# Altium PCB 题目二PCB.PcbDoc
Units mm, origin at the board's own origin, x right, y up, seen from the top; angles counter-clockwise.
Board outline 79 x 72 mm, 2 copper layers (Top Layer, Bottom Layer); 26 components, 43 nets, 197 pads, 4 vias.
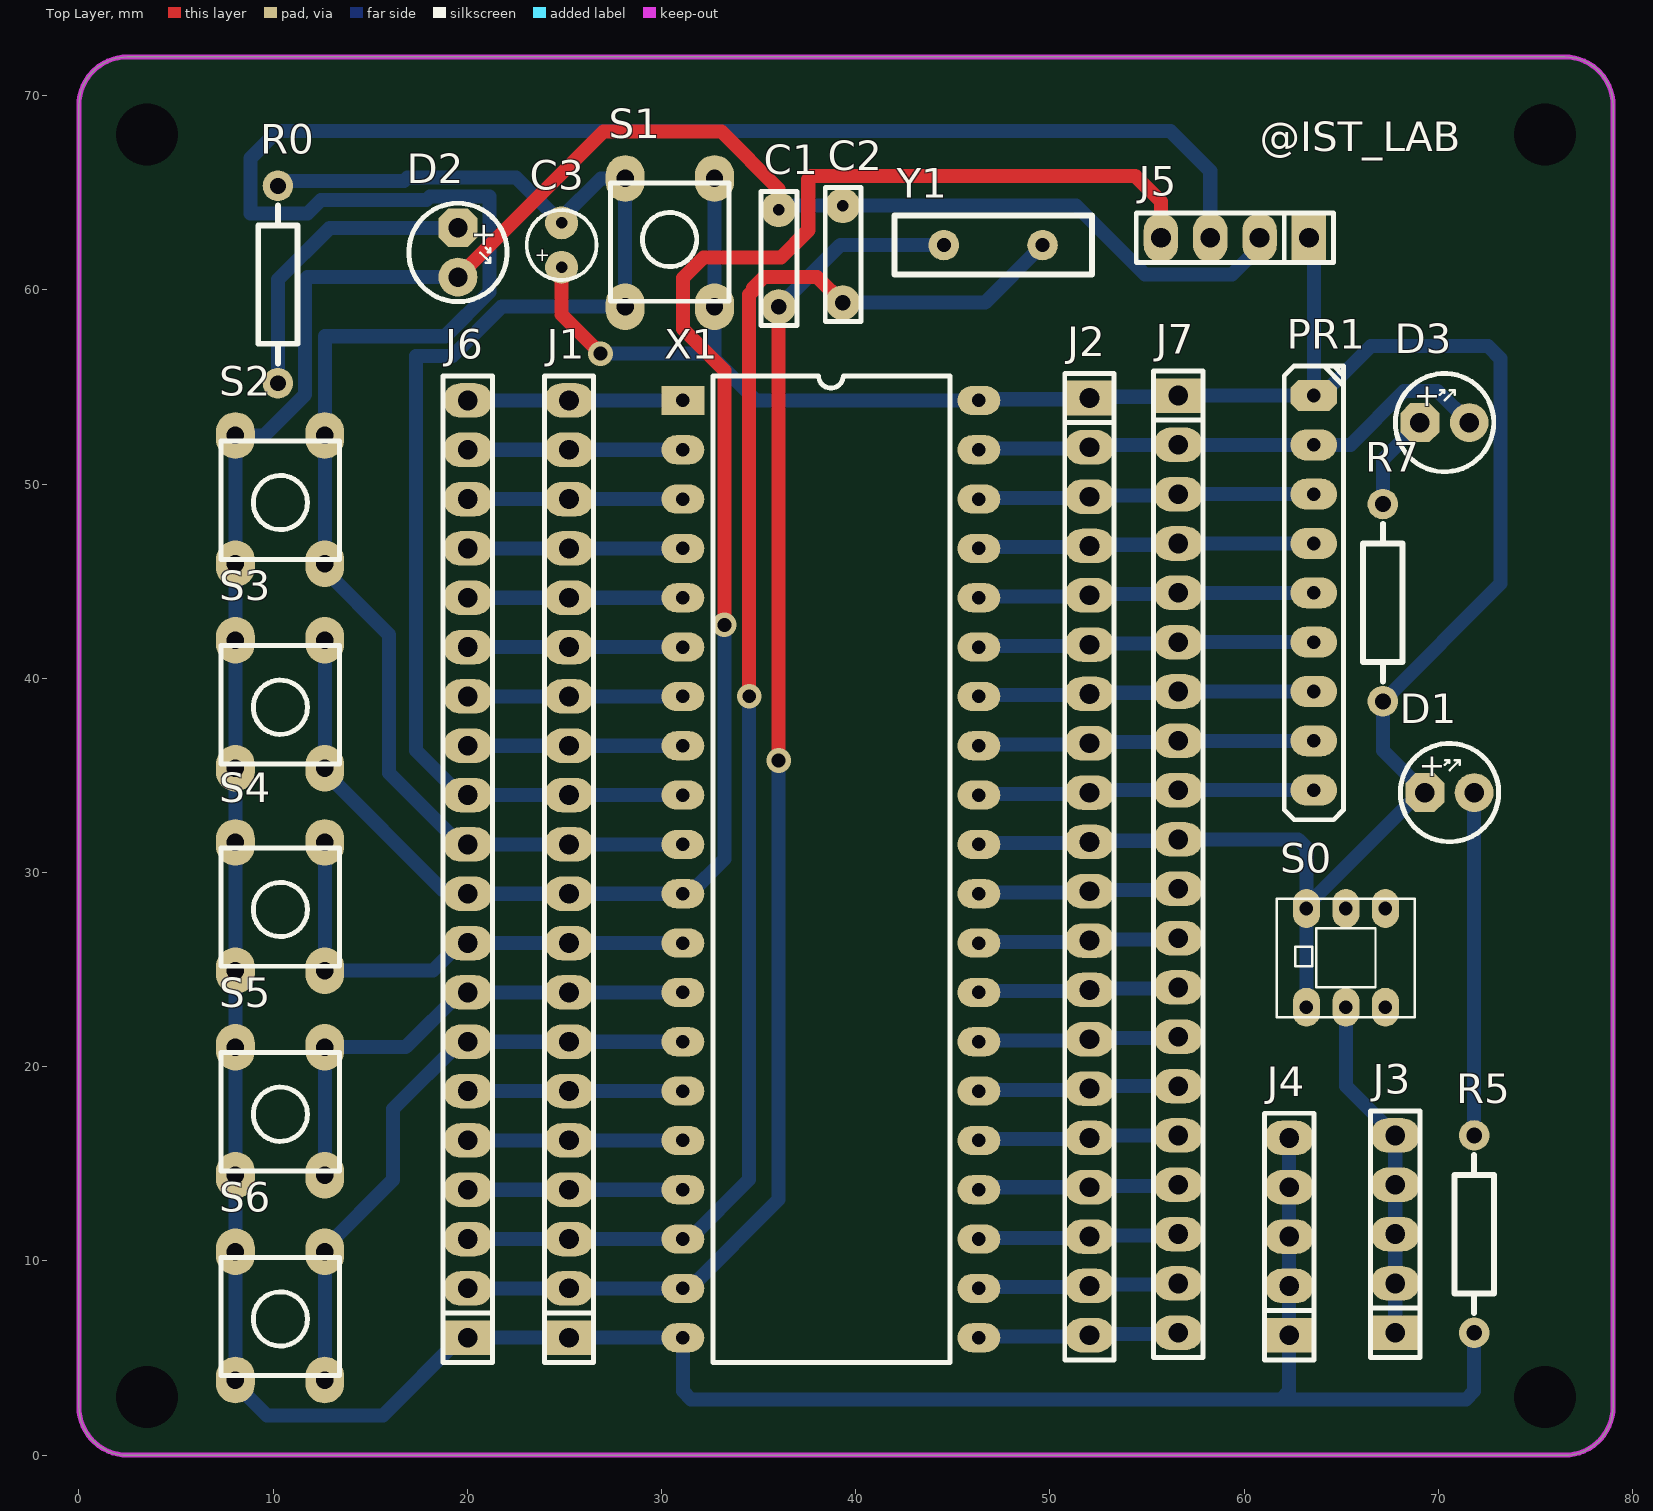
[diagram p0: Top Layer view]
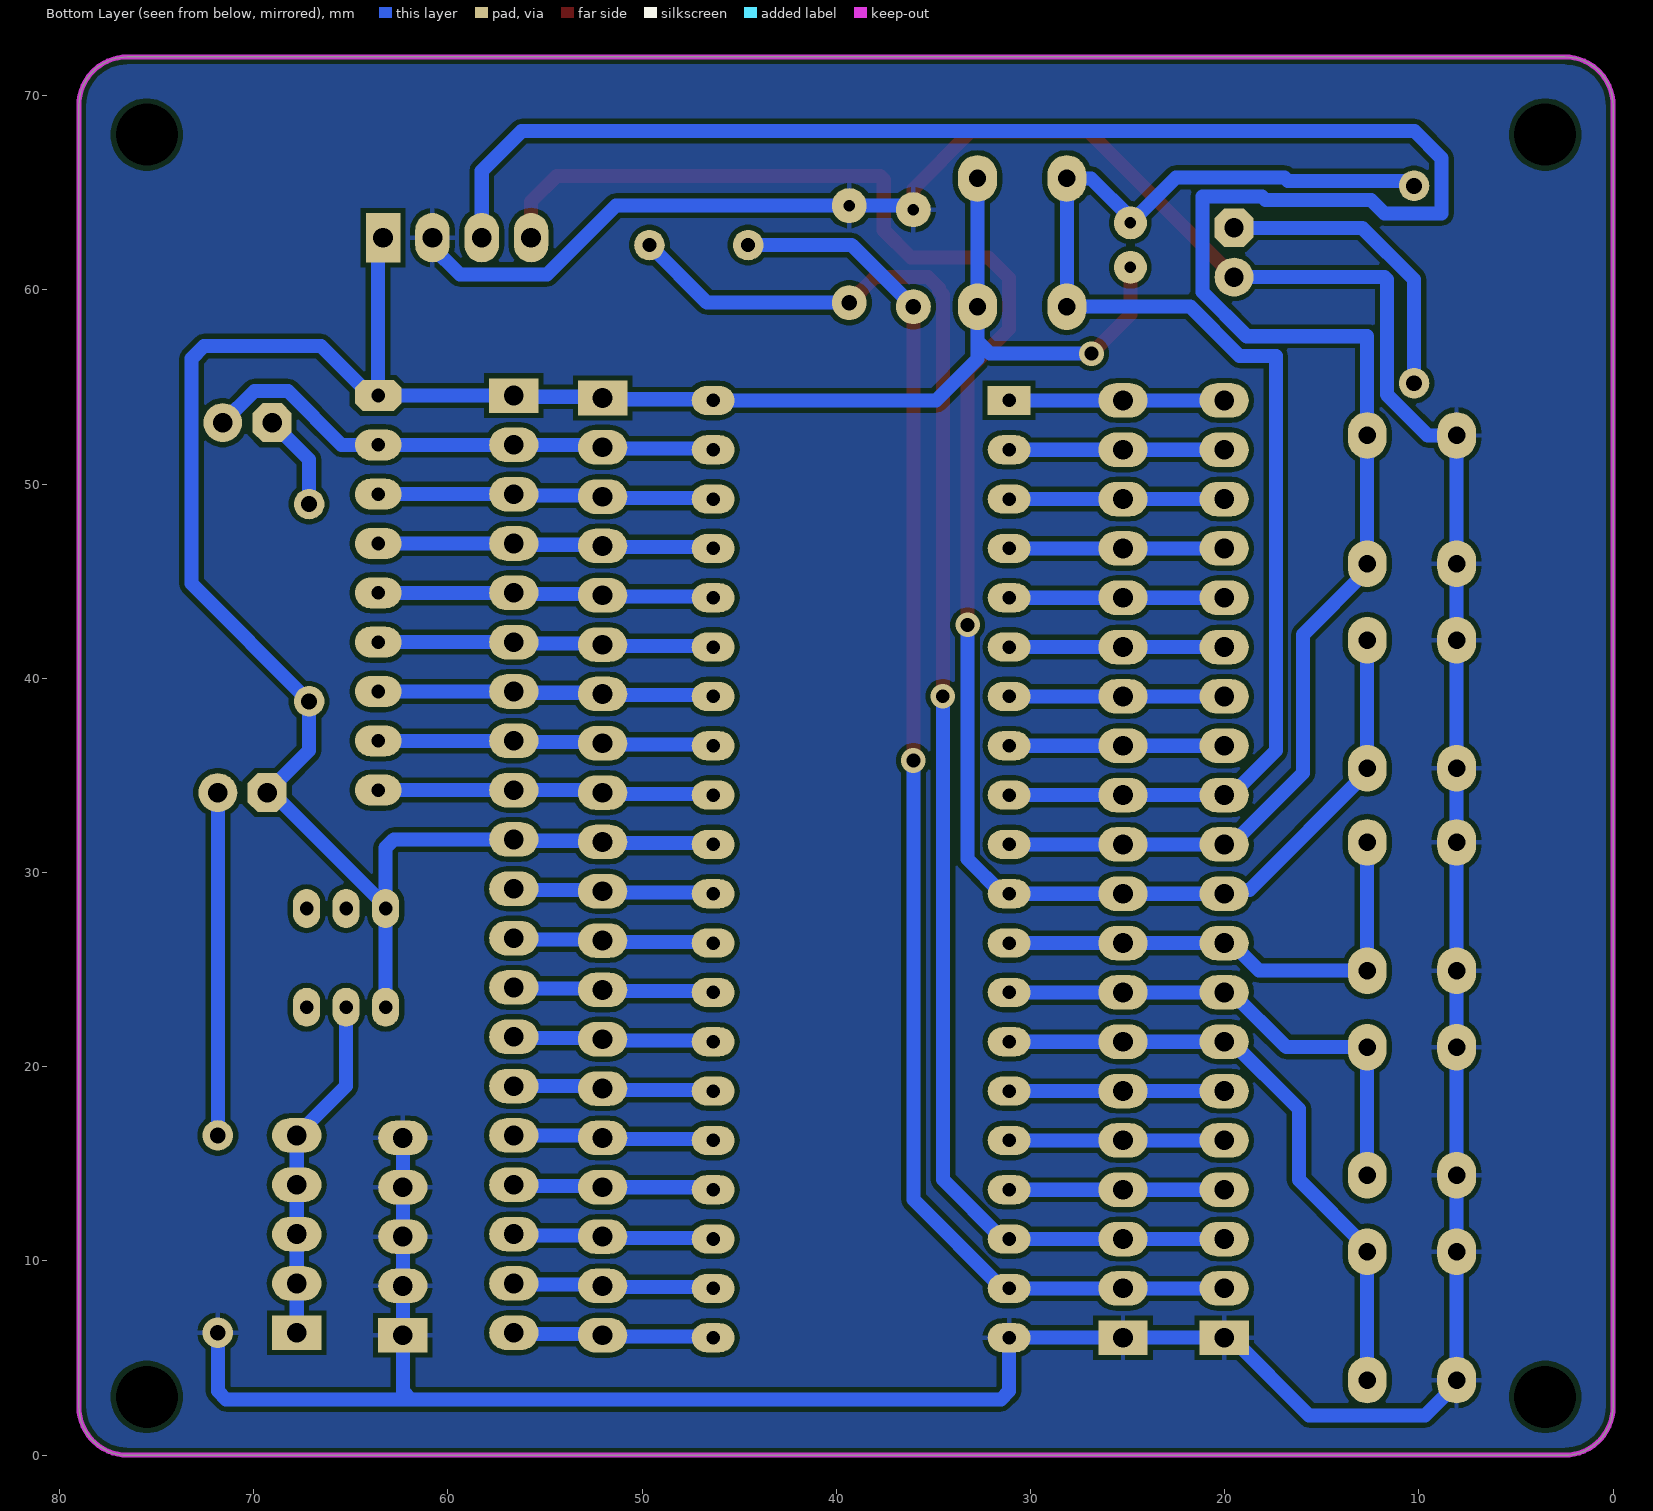
[diagram p1: Bottom Layer view, seen from below]

## Layer stack, top to bottom
Top Solder: solder mask 0.0102, Solder Resist, Dk 3.5
Top Layer: signal copper 0.0356
Dielectric 1: dielectric 0.32, FR-4, Dk 4.8
Bottom Layer: signal copper 0.0356
Bottom Solder: solder mask 0.0102, Solder Resist, Dk 3.5

## Board outline
0,2.5 ccw(c2.5,2.5) 2.5,0 76.5,0 ccw(c76.5,2.5) 79,2.5 79,69.5 ccw(c76.5,69.5) 76.5,72 2.5,72 ccw(c2.5,69.5) 0,69.5

## Design rules (kind name [scope] priority, off if disabled: settings)
Clearance [All] p1: gap=0.254 ignorepadtopadclearanceinfootprint=FALSE except(0: Arc-Hole Track-Hole SMDPad-Hole THPad-Hole Via-Hole Fill-Hole Poly-Hole Region-Hole Text-Hole)
PolygonConnect [All] p1: connectstyle=Relief reliefconductorwidth=0.254 reliefentries=4 polygonreliefangle="90 Angle" airgapwidth=0.254
RoutingVias [All] p1: holewidth=0.711 width=1.27 viastyle="Through Hole" minholewidth=0.711 minwidth=1.27 maxholewidth=0.711 maxwidth=1.27
SolderMaskExpansion [All] p1: expansion=0.102 istentingtop=FALSE
Width [All] p1: maxlimit=0.8 minlimit=0.6 preferedwidth=0.725 minimp=50.000000 maximp=50.000000 favimp=50.000000
30 further rules are at their usual default settings.

## Components (designator, comment, footprint, x,y, rotation, side; value= is the part's Value field where it differs from the comment)
C1 "22pf" CAP2 36.031,59.135 r90 top
C2 "22pf" CAP2 39.333,59.342 r90 top
C3 "10uf" CAO1 24.855,62.31 r90 top
D1 "LED" LED2_B 70.575,34.116 r0 top
D2 "LED" LED2_B 19.521,61.929 r270 top
D3 "LED" LED2_B 70.321,53.166 r0 top
J1 "CON20" sip-20 25.236,6.049 r90 top
J2 "CON20" sip-20 52.033,54.436 r270 top
J3 "CON5" sip-5 67.781,6.303 r90 top
J4 "CON5" sip-5 62.32,6.176 r90 top
J5 "CON4" sip-4 63.336,62.691 r180 top
J6 "CON20" sip-20 20.029,6.049 r90 top
J7 "CON20" sip-20 56.605,54.563 r270 top
PR1 "10K" RP1 63.59,54.563 r270 top
R0 "10K" AXIAL0.4 10.25,55.198 r90 top
R5 "1K" AXIAL0.4 71.845,16.463 r270 top
R7 "1K" AXIAL0.4 67.146,48.975 r270 top
S0 "SW-DPDT" SWH7*7 67.273,23.067 r180 top
S1 "SW-PB" SW6*6 28.129,59.139 r90 top
S2 "SW-PB" SW6*6 12.663,52.506 r270 top
S3 "SW-PB" SW6*6 12.663,41.965 r270 top
S4 "SW-PB" SW6*6 12.663,31.551 r270 top
S5 "SW-PB" SW6*6 12.663,21.01 r270 top
S6 "SW-PB" SW6*6 12.663,10.469 r270 top
X1 "STC89C52RC-DIP40" DIP-40 31.103,54.309 r0 top
Y1 "XTAL" XTAL1 49.62,62.31 r270 top

## Footprints (in the part's own frame and the unit in brackets; to place one, negate y for a bottom-side part, rotate by r counter-clockwise, add the part's x,y. Pads: shape width x height; smd on the part's side, far side on the other; paste and mask are expansions set on the pad)
AXIAL0.4 [mil]
  round 62 hole 32: 1(0,0) 2(400,0)
  silkscreen extent 40,-40 360,40
CAO1 [mm]
  round 1.7 hole 0.6: 1(-1.143,0) 2(1.143,0)
  silkscreen extent -1.8,-1.8 1.8,1.8
CAP2 [mm]
  round 1.8 hole 0.8: 1(0,0)
  round 1.8 hole 0.6: 2(5,0)
  silkscreen extent -0.98,-0.95 5.93,0.9
DIP-40 [mm]
  rect 2.2x1.5 hole 0.7: 1(0,0)
  oval 2.2x1.5 hole 0.7: 2(0,-2.54) 3(0,-5.08) 4(0,-7.62) 5(0,-10.16) 6(0,-12.7) 7(0,-15.24) 8(0,-17.78) 9(0,-20.32) 10(0,-22.86) 11(0,-25.4) 12(0,-27.94) 13(0,-30.48) 14(0,-33.02) 15(0,-35.56) 16(0,-38.1) 17(0,-40.64) 18(0,-43.18) 19(0,-45.72) 20(0,-48.26) 21(15.24,-48.26) 22(15.24,-45.72) 23(15.24,-43.18) 24(15.24,-40.64) 25(15.24,-38.1) 26(15.24,-35.56) 27(15.24,-33.02) 28(15.24,-30.48) 29(15.24,-27.94) 30(15.24,-25.4) 31(15.24,-22.86) 32(15.24,-20.32) 33(15.24,-17.78) 34(15.24,-15.24) 35(15.24,-12.7) 36(15.24,-10.16) 37(15.24,-7.62) 38(15.24,-5.08) 39(15.24,-2.54) 40(15.24,0)
  silkscreen extent 1.55,-49.53 13.74,1.27
LED2_B [mm] "5mm"
  oct 2x2 hole 1: 1(-1.27,0)
  round 2 hole 1: 2(1.27,0)
  silkscreen extent -2.53,-2.53 2.53,2.53, body extent -2.8,-2.91 2.55,2.79, height 8.85
RP1 [mm]
  oct 1.6x2.4 hole 0.7: 1(0,0)
  oval 1.6x2.4 hole 0.7: 2(2.54,0) 3(5.08,0) 4(7.62,0) 5(10.16,0) 6(12.7,0) 7(15.24,0) 8(17.78,0) 9(20.32,0)
  silkscreen extent -1.52,-1.52 21.84,1.52
sip-4 [mil]
  rect 70x100 hole 40: 1(0,0)
  oval 70x100 hole 40: 2(100,0) 3(200,0) 4(300,0)
  silkscreen extent -50,-50 350,50
sip-5 [mil]
  rect 70x100 hole 40: 1(0,0)
  oval 70x100 hole 40: 2(100,0) 3(200,0) 4(300,0) 5(400,0)
  silkscreen extent -50,-50 450,50
sip-20 [mil]
  rect 70x100 hole 40: 1(0,0)
  oval 70x100 hole 40: 2(100,0) 3(200,0) 4(300,0) 5(400,0) 6(500,0) 7(600,0) 8(700,0) 9(800,0) 10(900,0) 11(1000,0) 12(1100,0) 13(1200,0) 14(1300,0) 15(1400,0) 16(1500,0) 17(1600,0) 18(1700,0) 19(1800,0) 20(1900,0)
  silkscreen extent -50,-50 1950,50
SW6*6 [mm]
  oval 2.4x2 hole 0.9: 1(0,0) 1(6.6,0) 2(0,-4.6) 2(6.6,-4.6)
  silkscreen extent 0.28,-5.34 6.38,0.76
SWH7*7 [mm]
  oval 1.4x2 hole 0.7: 1(0,0) 2(2.032,0) 3(4.064,0) 4(4.064,-5.08) 5(2.032,-5.08) 6(0,-5.08)
  silkscreen extent -1.52,-5.59 5.59,0.51
XTAL1 [mil]
  round 62 hole 28: 1(0,0) 2(0,-200)
  silkscreen extent -60,-300 60,100

## Part data
C1 C2: library part CAP1
C3: library part CAP3
J1 J2 J3 J4 J5 J6 J7: "Connector"
PR1: library part PRES1
R0 R5 R7: library part RES, "电阻"
Y1: library part CPY

## Free pads (board coordinates)
  round 3.03 hole 3.2: 2(3.5,68) 4(3.5,3)
  round 1.524 hole 3.2: 5(75.5,68) 6(75.5,3)

## Via types
v1: diameter 1.27, hole 0.711, Top Layer to Bottom Layer, 4 vias

## Nets (pads, with @x,y where several pads share a name; then routed paths per layer and width w, separated by ;. In a path a pad name is that pad's centre, name@x,y a point inside that pad or via, vN(x,y) a via of type N, cw(c..) or ccw(c..) an arc to the next point about the centre after c; other vN are vias at no path point)
GND: C1.2 C2.2 D2.2 J1.1 J4.1 J4.2 J4.3 J4.4 J4.5 J5.2 J6.1 R5.2 S2.2 S3.2 S4.2 S5.2 S6.2 X1.20 | length 203.3
  Top Layer w0.725: D2.2 27.014,68.152 33.085,68.152 36.031,65.206 C1.2
  Bottom Layer w0.725: D2.2 11.774,60.659 11.654,60.539 11.654,54.616 9.543,52.506 8.063,52.506 8.063,45.906 8.063,41.965 8.063,35.365 8.063,31.551 8.063,24.951 8.063,21.01 8.063,14.41 8.063,10.469 8.063,3.869 8.063,3.481 7.837,3.255 8.477,3.255 9.68,2.052 15.651,2.052 19.648,6.049 J6.1 J1.1 X1.20 31.103,3.299 31.528,2.874 61.895,2.874 ; C1.2 35.825,64.341 35.825,64.342 C2.2 51.347,64.342 54.903,60.786 59.382,60.786 60.796,62.2 J5.2 ; J4.5 J4.4 J4.3 J4.2 J4.1 62.32,3.299 61.895,2.874 ; R5.2 71.845,3.299 71.42,2.874 61.895,2.874
NetD1_2: D1.2 R5.1 | length 17.7
  Bottom Layer w0.725: R5.1 D1.2
NetD2_1: D2.1 R0.1 | length 15.7
  Bottom Layer w0.725: R0.1 10.25,60.532 12.917,63.199 D2.1
NetD3_1: D3.1 R7.1 | length 5
  Bottom Layer w0.725: R7.1 67.146,51.261 D3.1
NetJ2_11: J2.11 J7.11 X1.30 | length 10.4
  Bottom Layer w0.725: X1.30 46.407,28.972 51.969,28.972 J2.11 52.096,29.099 56.541,29.099 J7.11
NetJ2_12: J2.12 J7.12 X1.29 | length 10.4
  Bottom Layer w0.725: X1.29 46.407,26.432 51.969,26.432 J2.12 52.096,26.559 56.541,26.559 J7.12
NetJ3_1: J3.1 J3.2 J3.3 J3.4 J3.5 S0.2 | length 17.9
  Bottom Layer w0.725: S0.2 65.241,19.003 67.199,17.045 67.199,16.949 67.685,16.463 J3.5 J3.4 J3.3 J3.2 J3.1
P00: D3.2 J2.2 J7.2 PR1.2 X1.39 | length 27.2
  Bottom Layer w0.725: X1.39 46.407,51.832 51.969,51.832 J2.2 52.16,52.023 J7.2 PR1.2 65.47,52.023 68.238,54.792 69.965,54.792 D3.2
P01: J2.3 J7.3 PR1.3 X1.38 | length 17.4
  Bottom Layer w0.725: X1.38 46.407,49.292 51.969,49.292 J2.3 52.096,49.419 56.541,49.419 J7.3 PR1.3
P02: J2.4 J7.4 PR1.4 X1.37 | length 17.4
  Bottom Layer w0.725: X1.37 46.407,46.752 51.969,46.752 J2.4 52.096,46.879 56.541,46.879 J7.4 PR1.4
P03: J2.5 J7.5 PR1.5 X1.36 | length 17.4
  Bottom Layer w0.725: X1.36 46.407,44.212 51.969,44.212 J2.5 52.096,44.339 56.541,44.339 J7.5 PR1.5
P04: J2.6 J7.6 PR1.6 X1.35 | length 17.4
  Bottom Layer w0.725: X1.35 46.407,41.672 51.969,41.672 J2.6 52.096,41.799 56.541,41.799 J7.6 PR1.6
P05: J2.7 J7.7 PR1.7 X1.34 | length 17.4
  Bottom Layer w0.725: X1.34 46.407,39.132 51.969,39.132 J2.7 52.096,39.259 56.541,39.259 J7.7 PR1.7
P06: J2.8 J7.8 PR1.8 X1.33 | length 17.4
  Bottom Layer w0.725: X1.33 46.407,36.592 51.969,36.592 J2.8 52.096,36.719 56.541,36.719 J7.8 PR1.8
P07: J2.9 J7.9 PR1.9 X1.32 | length 17.4
  Bottom Layer w0.725: X1.32 46.407,34.052 51.969,34.052 J2.9 52.16,34.243 J7.9 PR1.9
P10: J1.20 J6.20 X1.1 | length 11.1
  Bottom Layer w0.725: J6.20 J1.20 X1.1
P11: J1.19 J6.19 X1.2 | length 11.1
  Bottom Layer w0.725: J6.19 J1.19 X1.2
P12: J1.18 J6.18 X1.3 | length 11.1
  Bottom Layer w0.725: J6.18 J1.18 X1.3
P13: J1.17 J6.17 X1.4 | length 11.2
  Bottom Layer w0.725: J6.17 20.283,46.689 20.41,46.562 20.537,46.689 J1.17 X1.4
P14: J1.16 J6.16 X1.5 | length 11.1
  Bottom Layer w0.725: J6.16 J1.16 X1.5
P15: J1.15 J6.15 X1.6 | length 11.1
  Bottom Layer w0.725: J6.15 J1.15 X1.6
P16: J1.14 J6.14 X1.7 | length 11.1
  Bottom Layer w0.725: J6.14 J1.14 X1.7
P17: J1.13 J6.13 X1.8 | length 11.1
  Bottom Layer w0.725: J6.13 J1.13 X1.8
P20: J2.20 J7.20 X1.21 | length 10.4
  Bottom Layer w0.725: X1.21 46.407,6.112 51.969,6.112 J2.20 52.096,6.239 56.541,6.239 J7.20
P21: J2.19 J7.19 X1.22 | length 10.4
  Bottom Layer w0.725: X1.22 46.407,8.652 51.969,8.652 J2.19 52.096,8.779 56.541,8.779 J7.19
P22: J2.18 J7.18 X1.23 | length 10.4
  Bottom Layer w0.725: X1.23 46.407,11.192 51.969,11.192 J2.18 52.096,11.319 56.541,11.319 J7.18
P23: J2.17 J7.17 X1.24 | length 10.4
  Bottom Layer w0.725: X1.24 46.445,13.669 46.572,13.796 J2.17 52.096,13.859 56.541,13.859 J7.17
P24: J2.16 J7.16 X1.25 | length 10.4
  Bottom Layer w0.725: X1.25 46.407,16.272 51.969,16.272 J2.16 52.16,16.463 J7.16
P25: J2.15 J7.15 X1.26 | length 10.4
  Bottom Layer w0.725: X1.26 46.407,18.812 51.969,18.812 J2.15 52.16,19.003 J7.15
P26: J2.14 J7.14 X1.27 | length 10.4
  Bottom Layer w0.725: X1.27 46.407,21.352 51.969,21.352 J2.14 52.096,21.479 56.541,21.479 J7.14
P27: J2.13 J7.13 X1.28 | length 10.4
  Bottom Layer w0.725: X1.28 46.407,23.892 51.969,23.892 J2.13 52.096,24.019 56.541,24.019 J7.13
P32: J1.9 J6.9 S4.1 X1.12 | length 25.6
  Bottom Layer w0.725: S4.1@12.663,31.551 12.663,24.951 18.23,24.951 19.648,26.369 J6.9 J1.9 X1.12
P33: J1.8 J6.8 S5.1 X1.13 | length 26.2
  Bottom Layer w0.725: S5.1@12.663,14.41 12.663,21.01 16.829,21.01 19.648,23.829 J6.8 J1.8 X1.13
P34: J1.7 J6.7 S6.1 X1.14 | length 31.8
  Bottom Layer w0.725: S6.1@12.663,3.869 12.663,10.469 12.663,10.669 16.177,14.182 16.177,17.818 19.648,21.289 J6.7 J1.7 X1.14
P35: J1.6 J6.6 X1.15 | length 11.1
  Bottom Layer w0.725: J6.6 J1.6 X1.15
P36: J1.5 J6.5 X1.16 | length 11.1
  Bottom Layer w0.725: J6.5 J1.5 X1.16
P37: J1.4 J6.4 X1.17 | length 11.1
  Bottom Layer w0.725: J6.4 J1.4 X1.17
RST: C3.2 J1.12 J6.12 R0.2 S1.1 X1.9 | length 73.6
  Bottom Layer w0.725: R0.2 10.25,65.485 10.377,65.612 10.416,65.612 16.743,65.612 16.925,65.795 22.513,65.795 C3.2 24.855,63.717 26.877,65.739 28.129,65.739 28.129,59.139 21.773,59.139 19.229,56.595 17.362,56.595 17.362,36.275 19.648,33.989 J6.12 J1.12 X1.9
RXD: J1.11 J5.3 J6.11 S2.1 X1.10 | length 124.8
  Bottom Layer w0.725: X1.10 25.49,31.449 25.363,31.576 J1.11 J6.11 19.648,31.449 15.965,35.132 15.965,42.244 12.663,45.546 12.663,45.906 12.663,52.506 12.663,57.617 18.866,57.617 21.147,59.897 21.147,64.816 18.09,64.816 17.895,64.621 12.46,64.621 11.774,63.936 8.828,63.936 8.828,66.78 10.225,68.177 56.199,68.177 58.256,66.12 J5.3
TXD: J1.10 J5.4 J6.10 S3.1 X1.11 | length 92.2
  Top Layer w0.725: v1(33.237,42.752) 33.237,55.858 31.103,57.992 31.103,60.608 32.17,61.675 36.158,61.675 37.555,63.072 37.555,65.688 37.733,65.866 54.395,65.866 55.716,64.545 J5.4
  Bottom Layer w0.725: S3.1@12.663,41.965 12.663,35.365 12.663,35.165 18.717,29.11 19.828,29.11 J6.10 J1.10 X1.11 31.453,28.909 33.237,30.693 v1(33.237,42.752)
VCC: C3.1 D1.1 J2.1 J2.10 J5.1 J7.1 J7.10 PR1.1 R7.2 S0.3 S0.4 S1.2 X1.31 X1.40 | length 131.8
  Top Layer w0.725: C3.1 24.855,58.729 v1(26.862,56.722) ; PR1.1@63.336,54.563 PR1.1
  Bottom Layer w0.725: v1(26.862,56.722) 32.094,56.722 32.729,57.357 ; S1.2@32.729,65.739 32.729,59.139 32.729,57.357 ; X1.31 46.407,31.512 51.969,31.512 J2.10 52.096,31.639 56.541,31.639 J7.10 62.784,31.703 63.209,31.278 S0.4@63.209,28.277 ; S0.3 S0.4 S0.4@63.209,28.277 ; J5.1 63.209,62.691 63.59,62.31 PR1.1 ; 32.729,57.357 32.729,56.443 34.863,54.309 X1.40 46.407,54.372 51.969,54.372 J2.1 52.096,54.499 56.541,54.499 J7.1 PR1.1 ; S0.4@63.209,28.277 69.048,34.116 D1.1 67.146,36.275 R7.2 73.208,44.877 73.208,56.459 72.563,57.103 66.53,57.103 63.99,54.563 PR1.1
X1: C1.1 J1.2 J6.2 X1.19 Y1.2 | length 73.7
  Top Layer w0.725: v1(36.031,35.767) C1.1
  Bottom Layer w0.725: J6.2 J1.2 X1.19 31.453,8.589 36.031,13.167 v1(36.031,35.767) ; C1.1 39.206,62.31 Y1.2
X2: C2.1 J1.3 J6.3 X1.18 Y1.1 | length 78.7
  Top Layer w0.725: v1(34.514,39.076) 34.514,59.763 34.634,59.883 34.705,59.953 34.705,60.095 35.269,60.659 38.016,60.659 C2.1
  Bottom Layer w0.725: J6.3 J1.3 X1.18 31.453,11.129 34.514,14.19 v1(34.514,39.076) ; C2.1 46.652,59.342 Y1.1
pads on no net: S0.1 S0.5 S0.6

## Polygon pours and split planes (outlines as drawn)
GND on Bottom Layer "GND_L02_P000" (solid, pour order 0): 0,72 79,72 79,0 0,0

## Keep-outs
Keep-Out Layer:
  the board outline again, w0.254

## Silkscreen, mask and mechanical layers (free items; w line width, h text height)
Top Overlay:
  text "@IST_LAB" at 60.796,67.136 h1.52

## Text inside footprints (layer, text, board x,y; h text height)
C3: Top Overlay "+" at 24.18,61.385 h0.7 r90
D1: Top Overlay "+" at 69,34.954 h1.2
D2: Top Overlay "+" at 20.359,63.504 h1.2 r270
D3: Top Overlay "+" at 68.746,54.004 h1.2